# EAGLE board transceiver - Copy (2) (EAGLE 6.4)
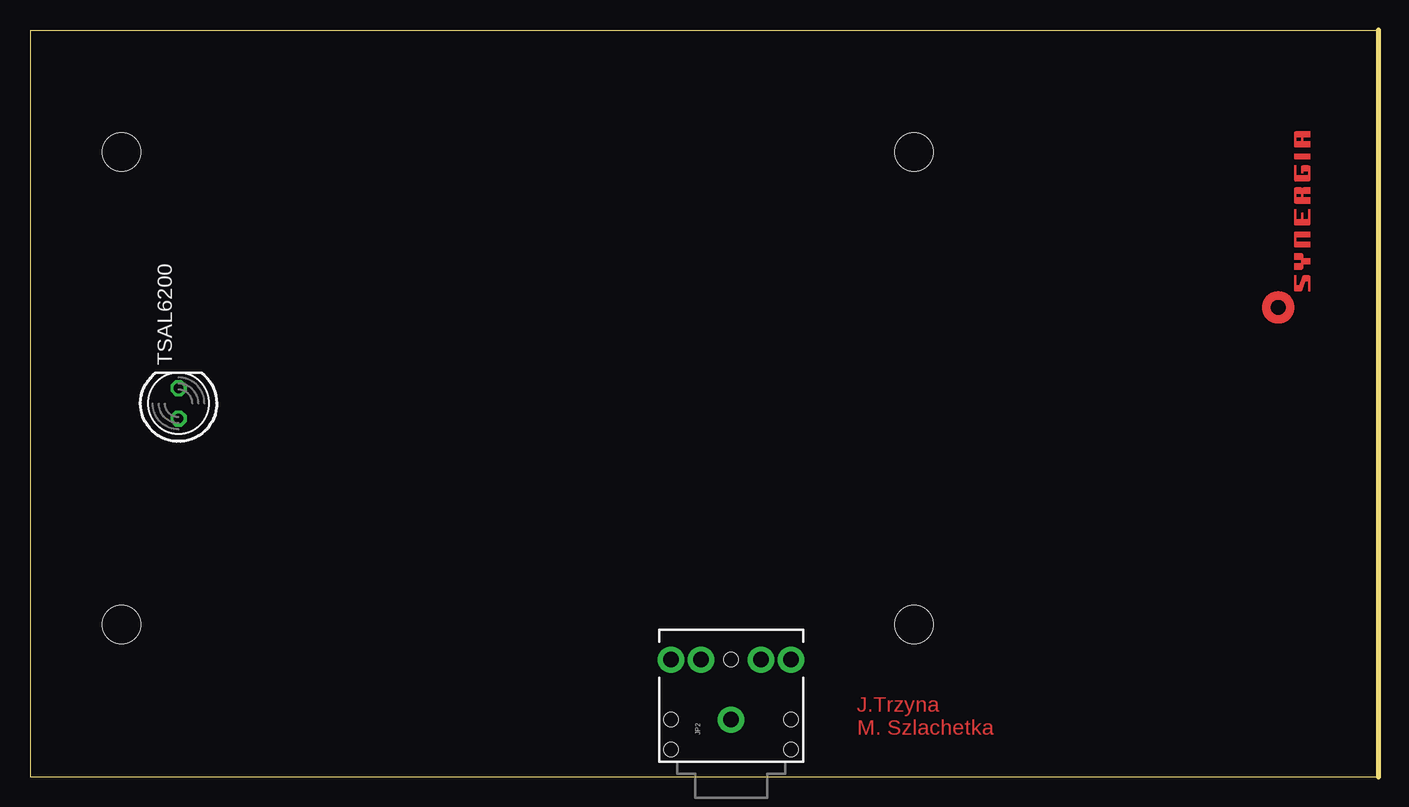
[diagram p0: board, top side]
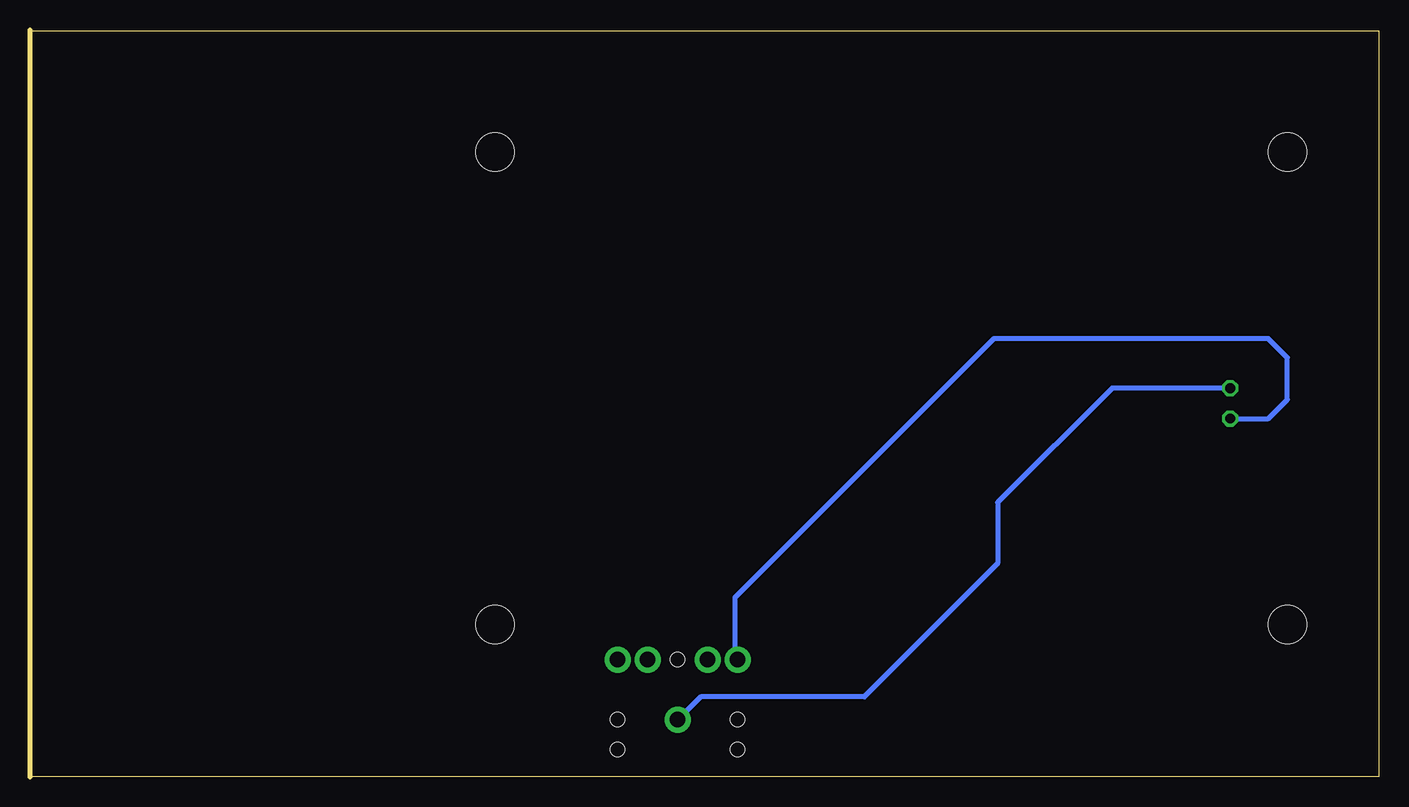
[diagram p1: board, bottom side, seen from below]

Size 112.39 x 62.23 mm. Coordinates in mm from the lower left corner, seen from the top.
Outline: 112.39,0 112.39,62.23
Outline: 0,0 112.38,0 112.38,62.15 0,62.15 0,61.91 0,0
Copper layers (1*16): Top 0.035mm / dielectric 1.5mm / Bottom 0.035mm
Design rules "default": minimum track width 10mil, minimum drill 24mil, track to track 8mil, track to pad 8mil, pad to pad 8mil, via to via 8mil, smd to smd 8mil, copper to edge 40mil, drill to drill 8mil, minimum pad ring 10mil, minimum via ring 8mil, stop-mask expansion 4mil, vias tented up to drill 0mil, thermal gap 10mil
Holes 3.2 mm at 7.62,52.07 7.62,12.7 73.66,12.7 73.66,52.07

## Footprints (pad centres in the part's own frame; a part is rotated, then mirrored left to right if it is on the bottom)
AUDIO-JACK = drill 1.3 pad 2.184: RING 5,5; RSH 5,2.5; SLEEVE 0,0; TIP 5,-5; TSH 5,-2.5 | hole 1.2: 0,5; -2.5,5; -2.5,-5; 0,-5; 5,0
LED5MM = drill 0.813 octagon: A -1.27,0; K 1.27,0

## Placement (x,y rotation side)
JP2  [AUDIO-JACK]  58.42,4.76 90 top
TSAL6200  [LED5MM]  12.38,31.11 90 top
U$3  [SYNERGIA_16MM]  106.68,37.78 90 top

## Library data of the parts
JP2 = SparkFun-Connectors
TSAL6200 = led
U$3 = synergia_logo

## Nets
N$3: JP2.RING TSAL6200.A
N$22: JP2.SLEEVE TSAL6200.K

## Tracks (layer width: path | path; a pad name or v marks a point on that pad's centre or on a via)
N$3
  Bottom 0.406: TSAL6200.A 9.21,29.84 7.62,31.43 7.62,34.92 9.21,36.51 32.07,36.51 53.66,14.92 53.66,10 JP2.RING
N$22
  Bottom 0.406: TSAL6200.K 22.23,32.38 31.75,22.86 31.75,17.78 42.86,6.67 56.52,6.67 JP2.SLEEVE

## Text on the board
Top: J.Trzyna / M. Szlachetka